# Altium PCB AdcUnit.PcbDoc
Units mil, origin at the board's own origin, x right, y up, seen from the top; angles counter-clockwise.
Board outline 6000 x 4000 mil, 2 copper layers (Top Layer, Bottom Layer); 57 components, 27 nets, 144 pads, 0 vias.
Unrouted connection lines stored in the file: 111.
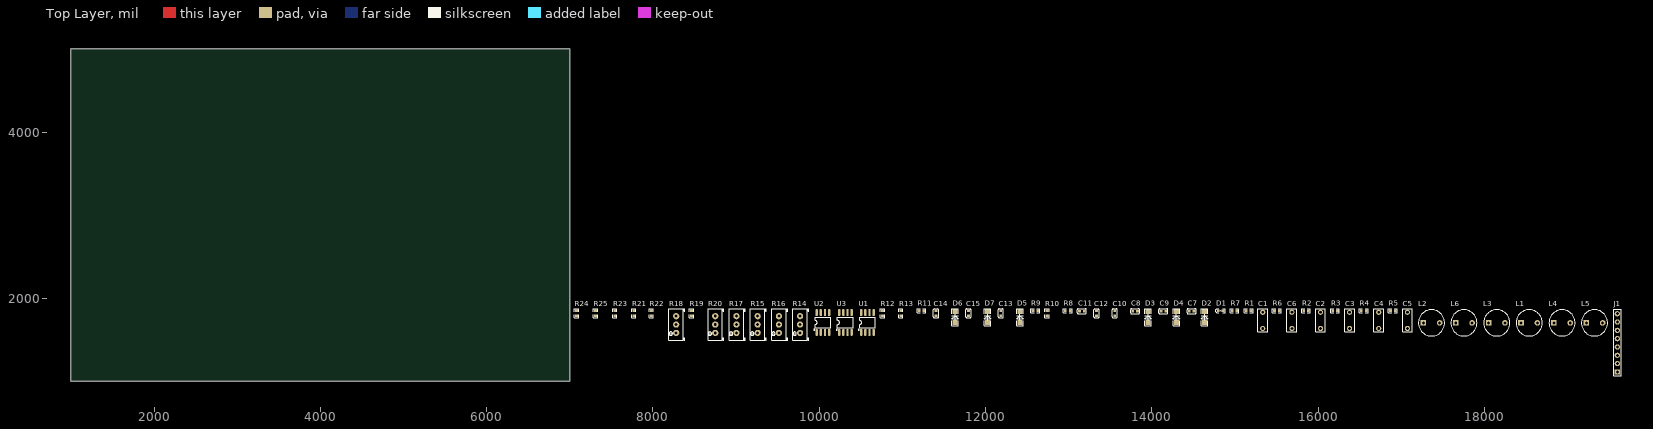
[diagram p0: Top Layer view]
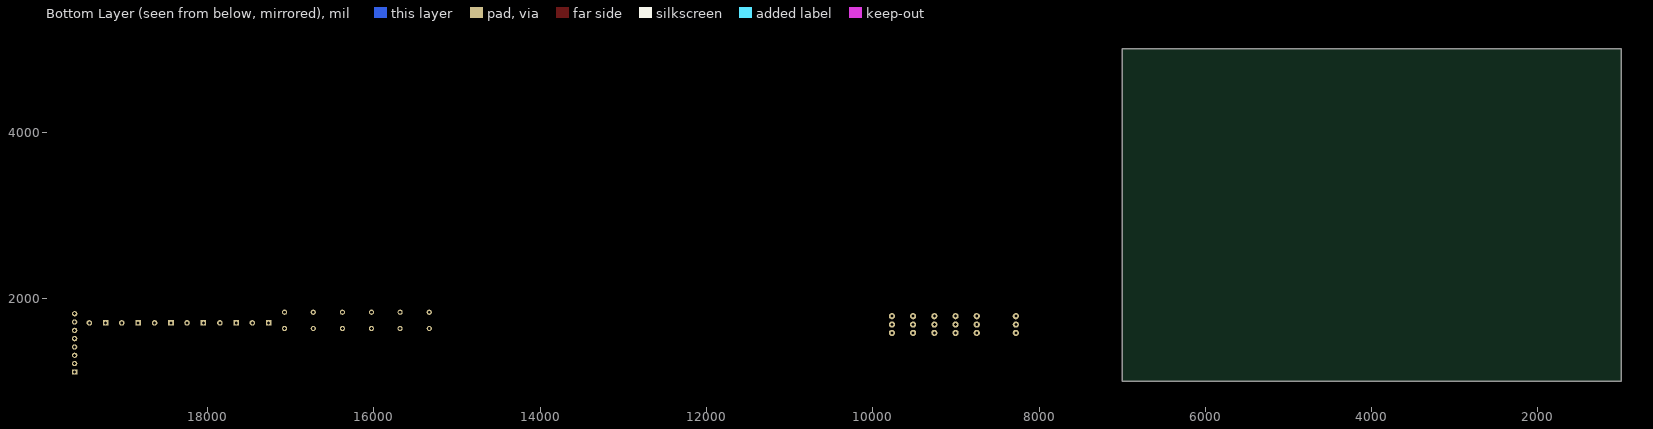
[diagram p1: Bottom Layer view, seen from below]

## Layer stack, top to bottom
Top Solder: solder mask 0.4, Solder Resist, Dk 3.5
Top Layer: signal copper 1.4
Dielectric 1: dielectric 12.6, FR-4, Dk 4.8
Bottom Layer: signal copper 1.4
Bottom Solder: solder mask 0.4, Solder Resist, Dk 3.5

## Board outline
1000,1000 7000,1000 7000,5000 1000,5000

## Design rules (kind name [scope] priority, off if disabled: settings)
Clearance [All] p1: gap=10
PolygonConnect [All] p1: connectstyle=Relief reliefconductorwidth=10 reliefentries=4 polygonreliefangle="90 Angle" airgapwidth=10
RoomDefinition AdcUnit [InComponentClass('AdcUnit')] p1: confinementstyle=ConfineIn formatcopy=TRUE lockcomponents=FALSE outline 7045,1060 19660,1060 19660,1985 7045,1985
RoutingVias [All] p1: holewidth=28 width=50 viastyle="Through Hole" minholewidth=28 minwidth=50 maxholewidth=28 maxwidth=50
SolderMaskExpansion [All] p1: expansion=4
Width [All] p1: maxlimit=10 minlimit=10 preferedwidth=10
30 further rules are at their usual default settings.

## Components (designator, comment, footprint, x,y, rotation, side; value= is the part's Value field where it differs from the comment)
C1 "6.8nF" CAP3 15335,1735 r90 top
C2 "6.8nF" CAP3 16030,1735 r90 top
C3 "6.8nF" CAP3 16380,1735 r90 top
C4 "6.8nF" CAP3 16730,1735 r90 top
C5 "6.8nF" CAP3 17075,1735 r90 top
C6 "6.8nF" CAP3 15685,1735 r90 top
C7 "22uF" CAP_0603 14480,1845 r0 top
C8 "22uF" CAP_0603 13800,1845 r0 top
C9 "22uF" CAP_0603 14140,1845 r0 top
C10 "104" CAP_0603 13555,1820 r90 top
C11 "104" CAP_0603 13160,1845 r0 top
C12 "104" CAP_0603 13335,1820 r90 top
C13 "22uF" CAP_0603 12185,1820 r90 top
C14 "22uF" CAP_0603 11405,1820 r90 top
C15 "22uF" CAP_0603 11795,1820 r90 top
D1 "LED" LED_0603_B 14830,1850 r0 top
D2 "ZMM3V3" LL34 14635,1775 r90 top
D3 "ZMM3V3" LL34 13955,1775 r90 top
D4 "ZMM3V3" LL34 14295,1775 r90 top
D5 "ZMM3V3" LL34 12415,1775 r90 top
D6 "ZMM3V3" LL34 11635,1775 r90 top
D7 "ZMM3V3" LL34 12025,1775 r90 top
J1 "Header" "Header 2.54X8" 19600,1465 r90 top
L1 "10mH" Inductor_8x10 18540,1705 r0 top
L2 "10mH" Inductor_8x10 17365,1705 r0 top
L3 "10mH" Inductor_8x10 18150,1705 r0 top
L4 "10mH" Inductor_8x10 18935,1705 r0 top
L5 "10mH" Inductor_8x10 19325,1705 r0 top
L6 "10mH" Inductor_8x10 17755,1705 r0 top
R1 "100k" RES_0603 15165,1850 r0 top
R2 "100k" RES_0603 15855,1850 r0 top
R3 "100k" RES_0603 16205,1850 r0 top
R4 "100k" RES_0603 16550,1850 r0 top
R5 "100k" RES_0603 16900,1850 r0 top
R6 "100k" RES_0603 15505,1850 r0 top
R7 "240" RES_0603 14995,1850 r0 top
R8 "100" RES_0603 12990,1850 r0 top
R9 "100" RES_0603 12600,1850 r0 top
R10 "100" RES_0603 12740,1820 r90 top
R11 "100" RES_0603 11230,1850 r0 top
R12 "100" RES_0603 10760,1820 r90 top
R13 "100" RES_0603 10980,1820 r90 top
R14 "100k" RES_POT-3296W 9770,1685 r90 top
R15 "100k" RES_POT-3296W 9260,1685 r90 top
R16 "100k" RES_POT-3296W 9515,1685 r90 top
R17 "100k" RES_POT-3296W 9005,1685 r90 top
R18 "100k" RES_POT-3296W 8280,1685 r90 top
R19 "240" RES_0603 8465,1820 r90 top
R20 "100k" RES_POT-3296W 8750,1685 r90 top
R21 "240" RES_0603 7770,1820 r90 top
R22 "240" RES_0603 7980,1820 r90 top
R23 "240" RES_0603 7540,1820 r90 top
R24 "240" RES_0603 7080,1820 r90 top
R25 "240" RES_0603 7310,1820 r90 top
U1 "LMV358IDR" SOIC-8_150MIL 10580,1710 r90 top
U2 "LMV358IDR" SOIC-8_150MIL 10045,1710 r90 top
U3 "LMV358IDR" SOIC-8_150MIL 10315,1710 r90 top

## Footprints (in the part's own frame and the unit in brackets; to place one, negate y for a bottom-side part, rotate by r counter-clockwise, add the part's x,y. Pads: shape width x height; smd on the part's side, far side on the other; paste and mask are expansions set on the pad)
CAP3 [mil]
  round 62 hole 35: 1(-97.92,0) 2(97.92,0)
  silkscreen extent -138,-59 138,59, body extent -142,-50 142,48, height 59
CAP_0603 [mm]
  rect 0.8x0.85 smd: 1(-0.73,0) 2(0.73,0)
  silkscreen extent -1.36,-0.8 1.34,0.8, body extent -0.8,-0.4 0.8,0.4, height 0.6
"Header 2.54X8" [mm]
  rect 1.6x1.6 hole 0.9: 1(-8.89,0)
  round 1.6 hole 0.9: 2(-6.35,0) 3(-3.81,0) 4(-1.27,0) 5(1.27,0) 6(3.81,0) 7(6.35,0) 8(8.89,0)
  silkscreen extent -10.03,-1.14 10.31,1.14, body extent -10.03,-1.23 10.29,1.27, height 8.3
Inductor_8x10 [mm]
  rect 1.7x1.7 hole 0.9: 1(-2.5,0)
  round 1.7 hole 0.9: 2(2.5,0)
  silkscreen extent -4,-4 4,4, body extent -4.15,-4.15 4.15,4.15, height 11.2
LED_0603_B [mm]
  rect 0.8x0.85 smd: A(0.73,0) C(-0.73,0)
  silkscreen extent -1.55,-0.65 1.35,0.65, body extent -0.81,-0.4 0.81,0.4, height 0.6
LL34 [mil]
  rect 60x60 smd: 1(-67.5,0) 2(67.5,0)
  silkscreen extent -102,-40 102,40, body extent -66,-30 71,29, height 59
RES_0603 [mm]
  rect 0.8x0.85 smd: 1(-0.73,0) 2(0.73,0)
  silkscreen extent -1.35,-0.65 1.35,0.65, body extent -0.8,-0.4 0.8,0.4, height 0.38
RES_POT-3296W [mm] "RES-ADJ-TH_3P-L9.5-W4.9-P2.50-L_3296W"
  round 1.9 hole 0.9: 1(-2.55,0) 2(-0.01,0) 3(2.55,0)
  silkscreen extent -4.75,-2.64 4.75,2.2, body extent -4.75,-2.59 4.75,2.41, height 11.5
SOIC-8_150MIL [mm]
  oval 2.2x0.7 smd: 1(-3.023,1.905) 2(-3.023,0.635) 3(-3.023,-0.635) 4(-3.023,-1.905) 5(3.023,-1.905) 6(3.023,-0.635) 7(3.023,0.635) 8(3.023,1.905)
  silkscreen extent -2.37,-2.41 1.55,2.83, body extent -3.03,-2.57 3.03,2.57, height 1.95

## Part data
C1 C2 C3 C4 C5 C6: library part CAP_聚苯电容
C7 C8 C9 C10 C11 C12 C13 C14 C15: library part CAP_0603
D1: library part LED_0603, "发光LED"
J1: library part "Header 2.54_8"
L1 L2 L3 L4 L5 L6: library part Inductor
R1 R2 R3 R4 R5 R6 R7 R8 R9 R10 R11 R12 R13 R19 R21 R22 R23 R24 R25: library part RES_0603
R14 R15 R16 R17 R18 R20: library part RES_POT-3296W, "可调电阻3296W"

## Nets (pads, with @x,y where several pads share a name; then routed paths per layer and width w, separated by ;. In a path a pad name is that pad's centre, name@x,y a point inside that pad or via, vN(x,y) a via of type N, cw(c..) or ccw(c..) an arc to the next point about the centre after c; other vN are vias at no path point)
GND: C1.2 C2.2 C3.2 C4.2 C5.2 C6.2 C7.2 C8.2 C9.2 C10.1 C11.1 C12.1 C13.2 C14.2 C15.2 D1.C D2.1 D3.1 D4.1 D5.1 D6.1 D7.1 J1.8 L1.1 L2.1 L3.1 L4.1 L5.1 L6.1 R1.1 R2.1 R3.1 R4.1 R5.1 R6.1 R19.1 R21.1 R22.1 R23.1 R24.1 R25.1 U1.4 U2.4 U3.4
LC1: C1.1 L2.2 R1.2 U2.3
LC2: C2.1 L3.2 R2.2 U2.5
LC3: C3.1 L1.2 R3.2 U1.3
LC4: C4.1 L4.2 R4.2 U1.5
LC5: C6.1 L6.2 R6.2 U3.3
LC6: C5.1 L5.2 R5.2 U3.5
NetD1_A: D1.A R7.1
NetR8_1: R8.1 R14.2 U1.1
NetR9_1: R9.1 R15.2 U2.1
NetR10_1: R10.1 R16.2 U3.1
NetR11_1: R11.1 R17.2 U1.7
NetR12_1: R12.1 R18.2 U2.7
NetR13_1: R13.1 R20.2 U3.7
NetR14_3: R14.3 R23.2 U1.2
NetR15_3: R15.3 R24.2 U2.2
NetR16_3: R16.3 R25.2 U3.2
NetR17_1: R17.1 R19.2 U1.6
NetR18_1: R18.1 R21.2 U2.6
NetR20_1: R20.1 R22.2 U3.6
OUT1: C8.1 D3.2 J1.6 R9.2
OUT2: C14.1 D6.2 J1.5 R12.2
OUT3: C7.1 D2.2 J1.4 R8.2
OUT4: C13.1 D5.2 J1.3 R11.2
OUT5: C9.1 D4.2 J1.2 R10.2
OUT6: C15.1 D7.2 J1.1 R13.2
VCC: C10.2 C11.2 C12.2 J1.7 R7.2 U1.8 U2.8 U3.8
pads on no net: R14.1 R15.1 R16.1 R17.3 R18.3 R20.3